# EAGLE board main (EAGLE 5.11)
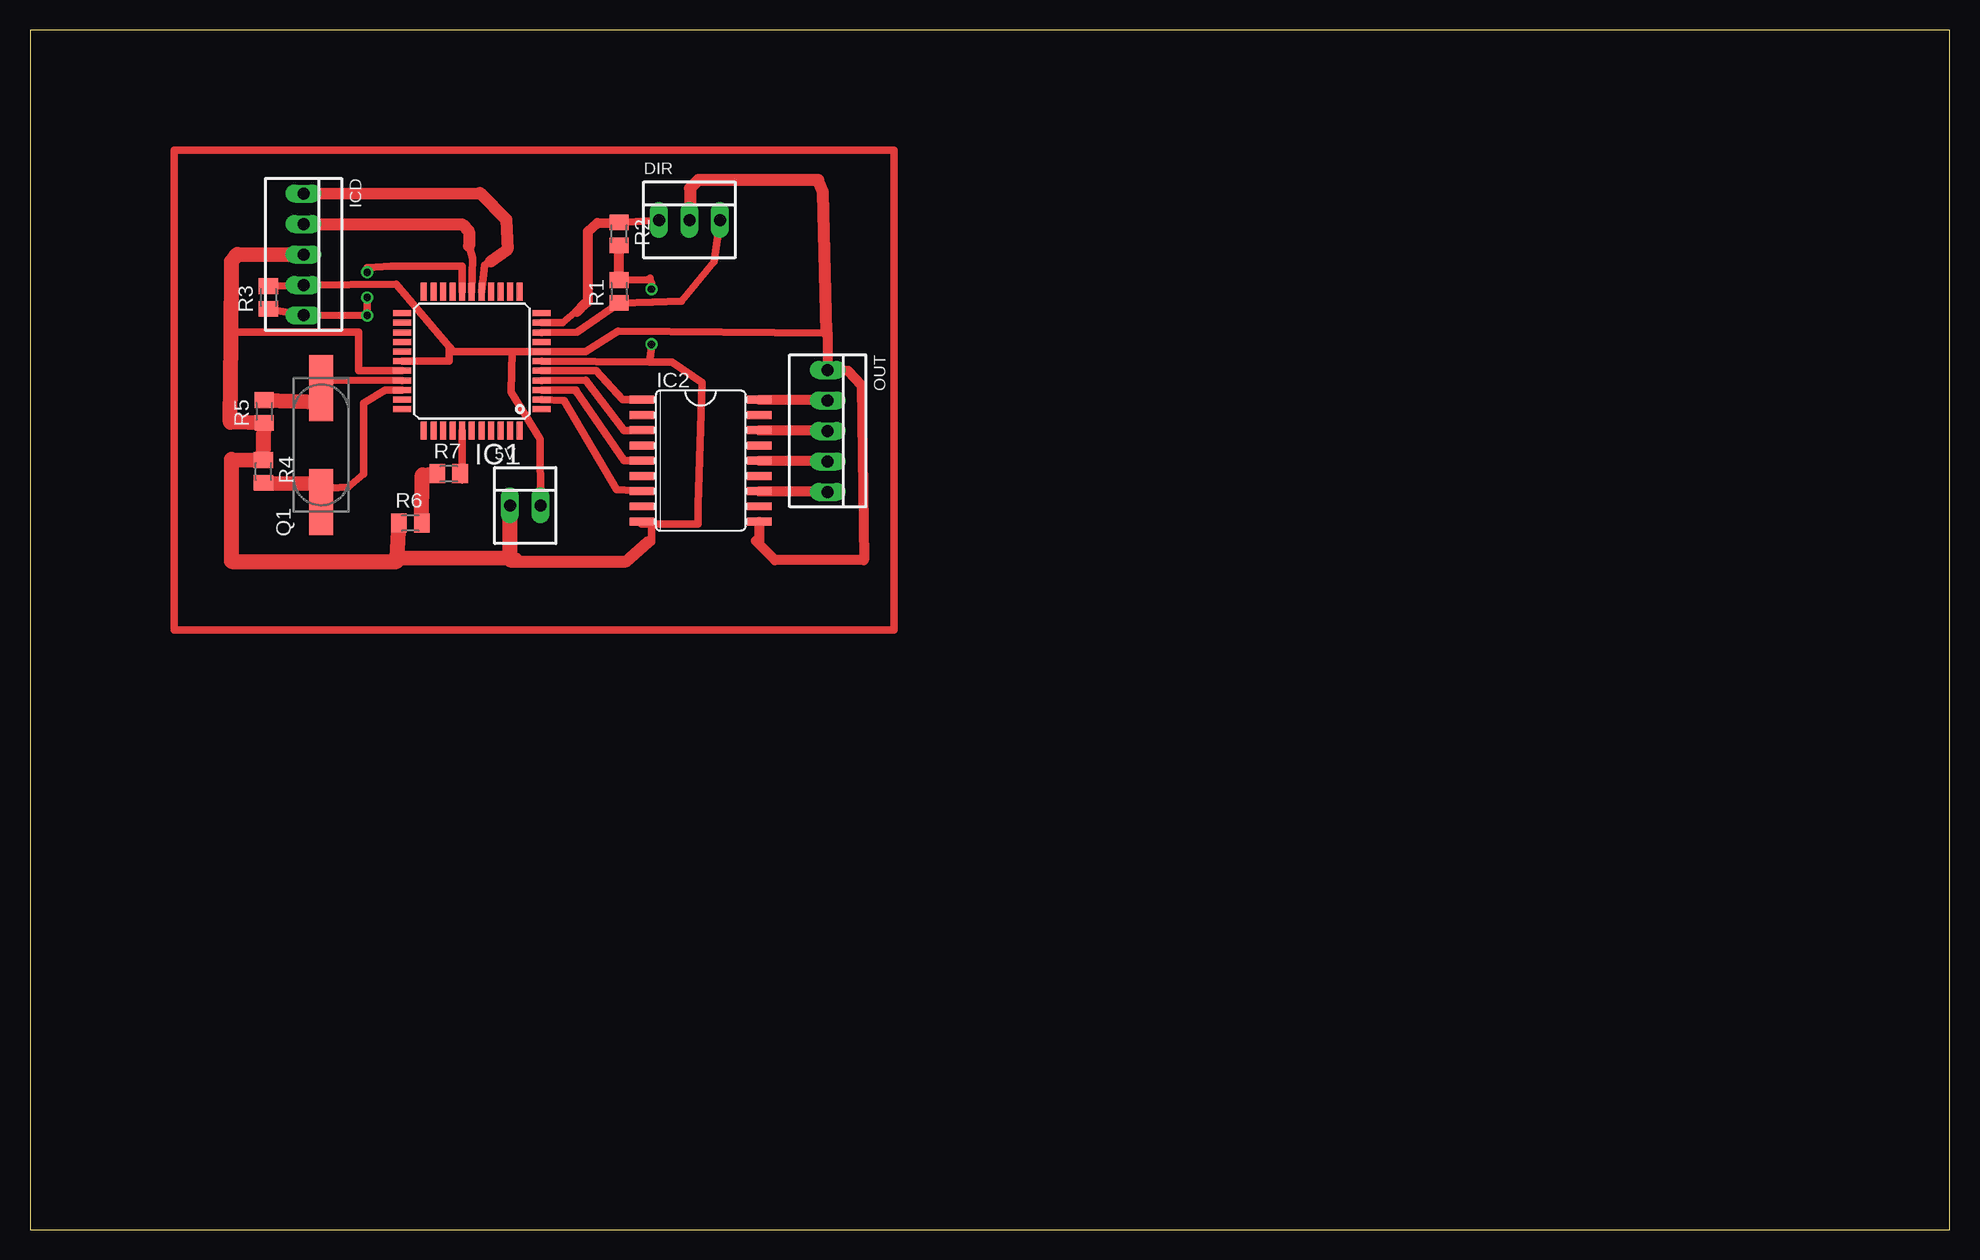
[diagram p0: board, top side]
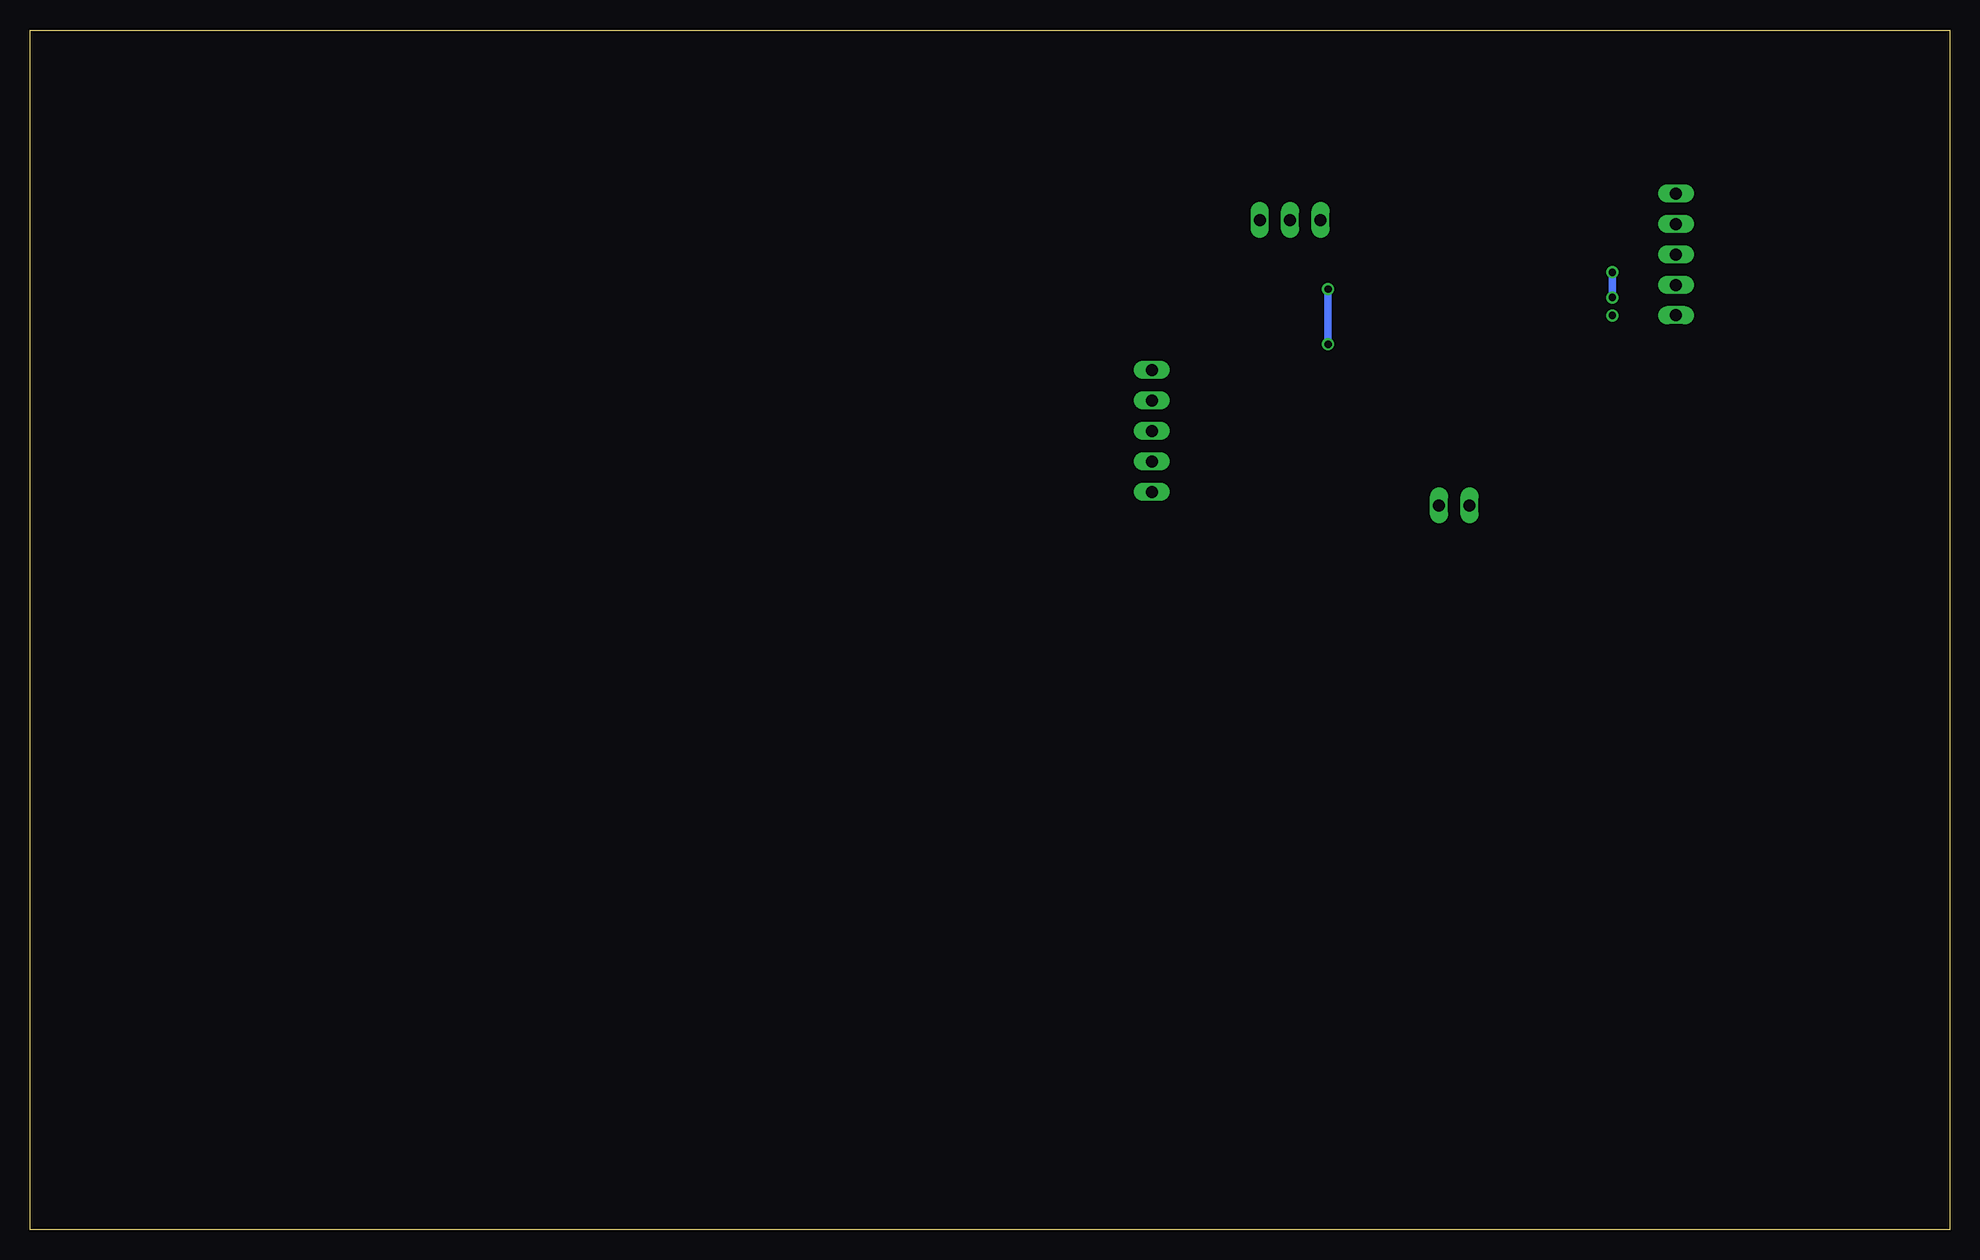
[diagram p1: board, bottom side, seen from below]

Size 160 x 100 mm. Coordinates in mm from the lower left corner, seen from the top.
Outline: 0,0 160,0 160,100 0,100 0,0
Copper layers (1*16): Top 0.035mm / dielectric 1.5mm / Bottom 0.035mm
Design rules "default": minimum track width 10mil, minimum drill 24mil, track to track 8mil, track to pad 8mil, pad to pad 8mil, via to via 8mil, smd to smd 8mil, copper to edge 40mil, drill to drill 8mil, minimum pad ring 10mil, minimum via ring 8mil, stop-mask expansion 4mil, vias tented up to drill 0mil, thermal gap 10mil

## Footprints (pad centres in the part's own frame; a part is rotated, then mirrored left to right if it is on the bottom)
22-23-2021 = drill 1 long: 1 -1.27,0; 2 1.27,0
22-23-2031 = drill 1 long: 1 -2.54,0; 2 0,0; 3 2.54,0
TQFP44 = smd 1.5 x 0.5: 1 -5.8,4; 2 -5.8,3.2; 3 -5.8,2.4; 4 -5.8,1.6; 5 -5.8,0.8; 6 -5.8,0; 7 -5.8,-0.8; 8 -5.8,-1.6; 9 -5.8,-2.4; 10 -5.8,-3.2; 11 -5.8,-4; 23 5.8,-4; 24 5.8,-3.2; 25 5.8,-2.4; 26 5.8,-1.6; 27 5.8,-0.8; 28 5.8,0; 29 5.8,0.8; 30 5.8,1.6; 31 5.8,2.4; 32 5.8,3.2; 33 5.8,4 | smd 0.5 x 1.5: 12 -4,-5.8; 13 -3.2,-5.8; 14 -2.4,-5.8; 15 -1.6,-5.8; 16 -0.8,-5.8; 17 0,-5.8; 18 0.8,-5.8; 19 1.6,-5.8; 20 2.4,-5.8; 21 3.2,-5.8; 22 4,-5.8; 34 4,5.8; 35 3.2,5.8; 36 2.4,5.8; 37 1.6,5.8; 38 0.8,5.8; 39 0,5.8; 40 -0.8,5.8; 41 -1.6,5.8; 42 -2.4,5.8; 43 -3.2,5.8; 44 -4,5.8
SO18L = smd 0.66 x 2.032: 1 -5.08,-4.902; 2 -3.81,-4.902; 3 -2.54,-4.902; 4 -1.27,-4.902; 5 0,-4.902; 6 1.27,-4.902; 7 2.54,-4.902; 8 3.81,-4.902; 9 5.08,-4.902; 10 5.08,4.902; 11 3.81,4.902; 12 2.54,4.902; 13 1.27,4.902; 14 0,4.902; 15 -1.27,4.902; 16 -2.54,4.902; 17 -3.81,4.902; 18 -5.08,4.902
22-23-2051 = drill 1 long: 1 -5.08,0; 2 -2.54,0; 3 0,0; 4 2.54,0; 5 5.08,0
CSM-7X-DU = smd 5.5 x 2: 1 -4.75,0; 2 4.75,0
M0805 = smd 1.3 x 1.6: 1 -0.95,0; 2 0.95,0

## Placement (x,y rotation side)
5V  22-23-2021  [22-23-2021]  41.28,60.36 0 top
DIR  22-23-2031  [22-23-2031]  54.96,84.16 0 top
IC1  PIC18F4550_TQFP  [TQFP44]  36.83,72.39 180 top
IC2  MCP2515T-I/SO  [SO18L]  55.9,64.1 270 top
ICD  22-23-2051  [22-23-2051]  22.8,81.29 270 top
OUT  22-23-2051  [22-23-2051]  66.49,66.58 270 top
Q1  CSM-7X-DU  [CSM-7X-DU]  24.28,65.41 90 top
R1  [M0805]  49.11,78.2 90 top
R2  [M0805]  49.11,83 270 top
R3  [M0805]  19.87,77.7 90 top
R4  [M0805]  19.45,63.2 270 top
R5  [M0805]  19.53,68.2 90 top
R6  [M0805]  31.7,58.89 0 top
R7  [M0805]  34.9,63.01 0 top

## Library data of the parts
5V = con-molex; MF: MOLEX; MPN: 22-23-2021; OC_FARNELL: 1462926; OC_NEWARK: 25C3832
DIR = con-molex; MF: MOLEX; MPN: 22-23-2031; OC_FARNELL: 1462950; OC_NEWARK: 30C0862
IC1 = microchip; MF: MICROCHIP; MPN: PIC18F4550-I/PT; OC_FARNELL: 9321365; OC_NEWARK: 08J9633
IC2 = mcp2515
ICD OUT = con-molex; MF: MOLEX; MPN: 22-23-2051; OC_FARNELL: 1462952; OC_NEWARK: 38C9178
Q1 = crystal; OC_FARNELL: unknown; OC_NEWARK: unknown
R1-R7 = rcl

## Nets
N$1: IC1.2 IC2.7
N$2: IC1.3 IC2.5
N$3: IC1.4 IC2.3
N$4: IC1.5 IC2.1
N$6: 5V.1 IC1.6 IC1.29 IC2.9 ICD.3 R1.2 R2.2 R4.1 R5.1 R6.1
N$7: IC1.31 Q1.1 R4.2
N$8: IC1.30 Q1.2 R5.2
N$9: IC1.17 ICD.2
N$10: IC1.16 ICD.1
N$11: IC1.18 ICD.5 R3.1
N$12: DIR.3 IC1.9 R1.1
N$13: DIR.1 IC1.10 R2.1
N$14: 5V.2 DIR.2 IC1.7 IC1.28 IC2.10 ICD.4 OUT.1 R3.2
N$15: IC1.38 R7.2
N$16: R6.2 R7.1
N$17: IC2.18 OUT.2
N$18: IC2.16 OUT.3
N$19: IC2.14 OUT.4
N$20: IC2.12 OUT.5

## Tracks (layer width: path | path; a pad name or v marks a point on that pad's centre or on a via)
N$1
  Top 0.61: IC1.2 44.5,69.1 48.9,61.7 IC2.7
N$2
  Top 0.61: IC2.5 49.5,64.1 45.5,69.9 45.5,69.99 IC1.3
N$3
  Top 0.61: IC1.4 46.3,70.8 49.5,66.6 51,66.6 IC2.3
N$4
  Top 0.61: IC1.5 47.2,71.6 49.4,69.2 51,69.2 IC2.1
N$5
  Top 0.61: 12,90 12,50 72,50 72,90 12,90
N$6  (via drill 0.6)
  Top 0.61: 51.64,72.31 53.5,72.3 56,70.6 55.7,60.4 55.7,58.8 51.8,58.8 | 51.64,72.31 IC1.6 | R1.2 51.5,79.2 51.7,79.3 51.7,79.2 51.8,78.9 v51.8,78.4 | 51.64,72.31 51.8,73.6 v51.8,73.8 | 51.5,57.3 51.8,57.3 51.8,58.8 | 51.8,58.8 51,58.8 IC2.9 | IC1.29 27.4,71.59 27.4,74.8 16.75,74.8 16.75,74.2
  Top 0.813: R1.2 R2.2 | 40.6,55.7 40.6,56 40,56
  Top 1.016: 5V.1 40.01,55.7 49.7,55.7 51.5,57.3
  Top 1.27: 30.62,56.03 30.6,55.7 16.8,55.7 16.8,64.2 R4.1 R5.1 16.7,67.3 16.75,74.2 16.8,80.7 17.1,81.1 17.3,81.3 ICD.3 | 30.62,56.03 R6.1 | 5V.1 40,56 30.62,56.03
  Bottom 0.61: v51.8,73.8 v51.8,78.4
N$7
  Top 0.61: IC1.31 29.6,70 27.8,68.9 27.8,63 26.5,61.9 24.22,61.77
  Top 1.27: R4.2 24.2,62.2 24.22,61.77 Q1.1
N$8
  Top 0.61: IC1.30 24.3,70.8 Q1.2
  Top 1.27: R5.2 24.3,69 Q1.2
N$9
  Top 0.61: 36.6,82 36.9,81 IC1.17
  Top 1.016: ICD.2 29.1,83.8 36,83.8 36.6,83.2 36.6,82
N$10
  Top 0.61: 38.4,80.7 37.9,80.4 IC1.16
  Top 1.016: ICD.1 37.5,86.4 39.7,84.2 39.8,81.7 38.4,80.7
N$11  (via drill 0.6)
  Top 0.61: IC1.18 36,80.3 30.1,80.3 28.1,80.2 v28.1,79.8 | R3.1 ICD.5 v28.1,76.2 v28.1,77.7
  Bottom 0.61: v28.1,77.7 v28.1,79.8 | ICD.5
N$12
  Top 0.61: IC1.9 45.6,74.8 R1.1 51.9,77.3 54.3,77.4 57,80.7 DIR.3
N$13
  Top 0.61: IC1.10 44.4,75.6 46.2,77.1 | R2.1 DIR.1
  Top 0.813: R2.1 47.3,83.9 46.5,83.2 46.5,77.4 46.2,77.1 45.6,76.5
N$14
  Top 0.61: R3.2 ICD.4 30.5,78.8 34.95,73.6 | 5V.2 42.5,65.9 40.1,69.8 40.2,73.2 | 40.2,73.2 IC1.7 45.3,73.2 46.3,73.2 49,74.9 66.41,74.72 | 40.2,73.2 35.3,73.2 34.95,73.6 | IC1.28 34.95,72.39 34.95,73.6
  Top 0.813: 66.41,74.72 66.49,74.72 OUT.1 68.2,71.6 69.3,70.4 69.5,55.8 62.1,55.8 60.5,57.4 60.8,57.4 IC2.10
  Top 1.016: DIR.2 55,86.8 55.7,87.5 65.7,87.5 66.1,86.5 66.41,74.72
N$15
  Top 0.61: IC1.38 36,62.5 R7.2
N$16
  Top 1.27: R6.2 32.7,62.9 R7.1
N$17
  Top 0.813: IC2.18 66.49,69.18 OUT.2
N$18
  Top 0.813: IC2.16 66.49,66.64 OUT.3
N$19
  Top 0.813: IC2.14 66.49,64.1 OUT.4
N$20
  Top 0.813: IC2.12 66.49,61.56 OUT.5